# Altium PCB Sensor.PcbDoc (part 1 of 3)
Units mil, origin at the board's own origin, x right, y up, seen from the top; angles counter-clockwise.
Board outline 4000 x 3000 mil, 2 copper layers (Top Layer, Bottom Layer); 1202 components, 71 nets, 2560 pads, 0 vias.
Unrouted connection lines stored in the file: 2489.
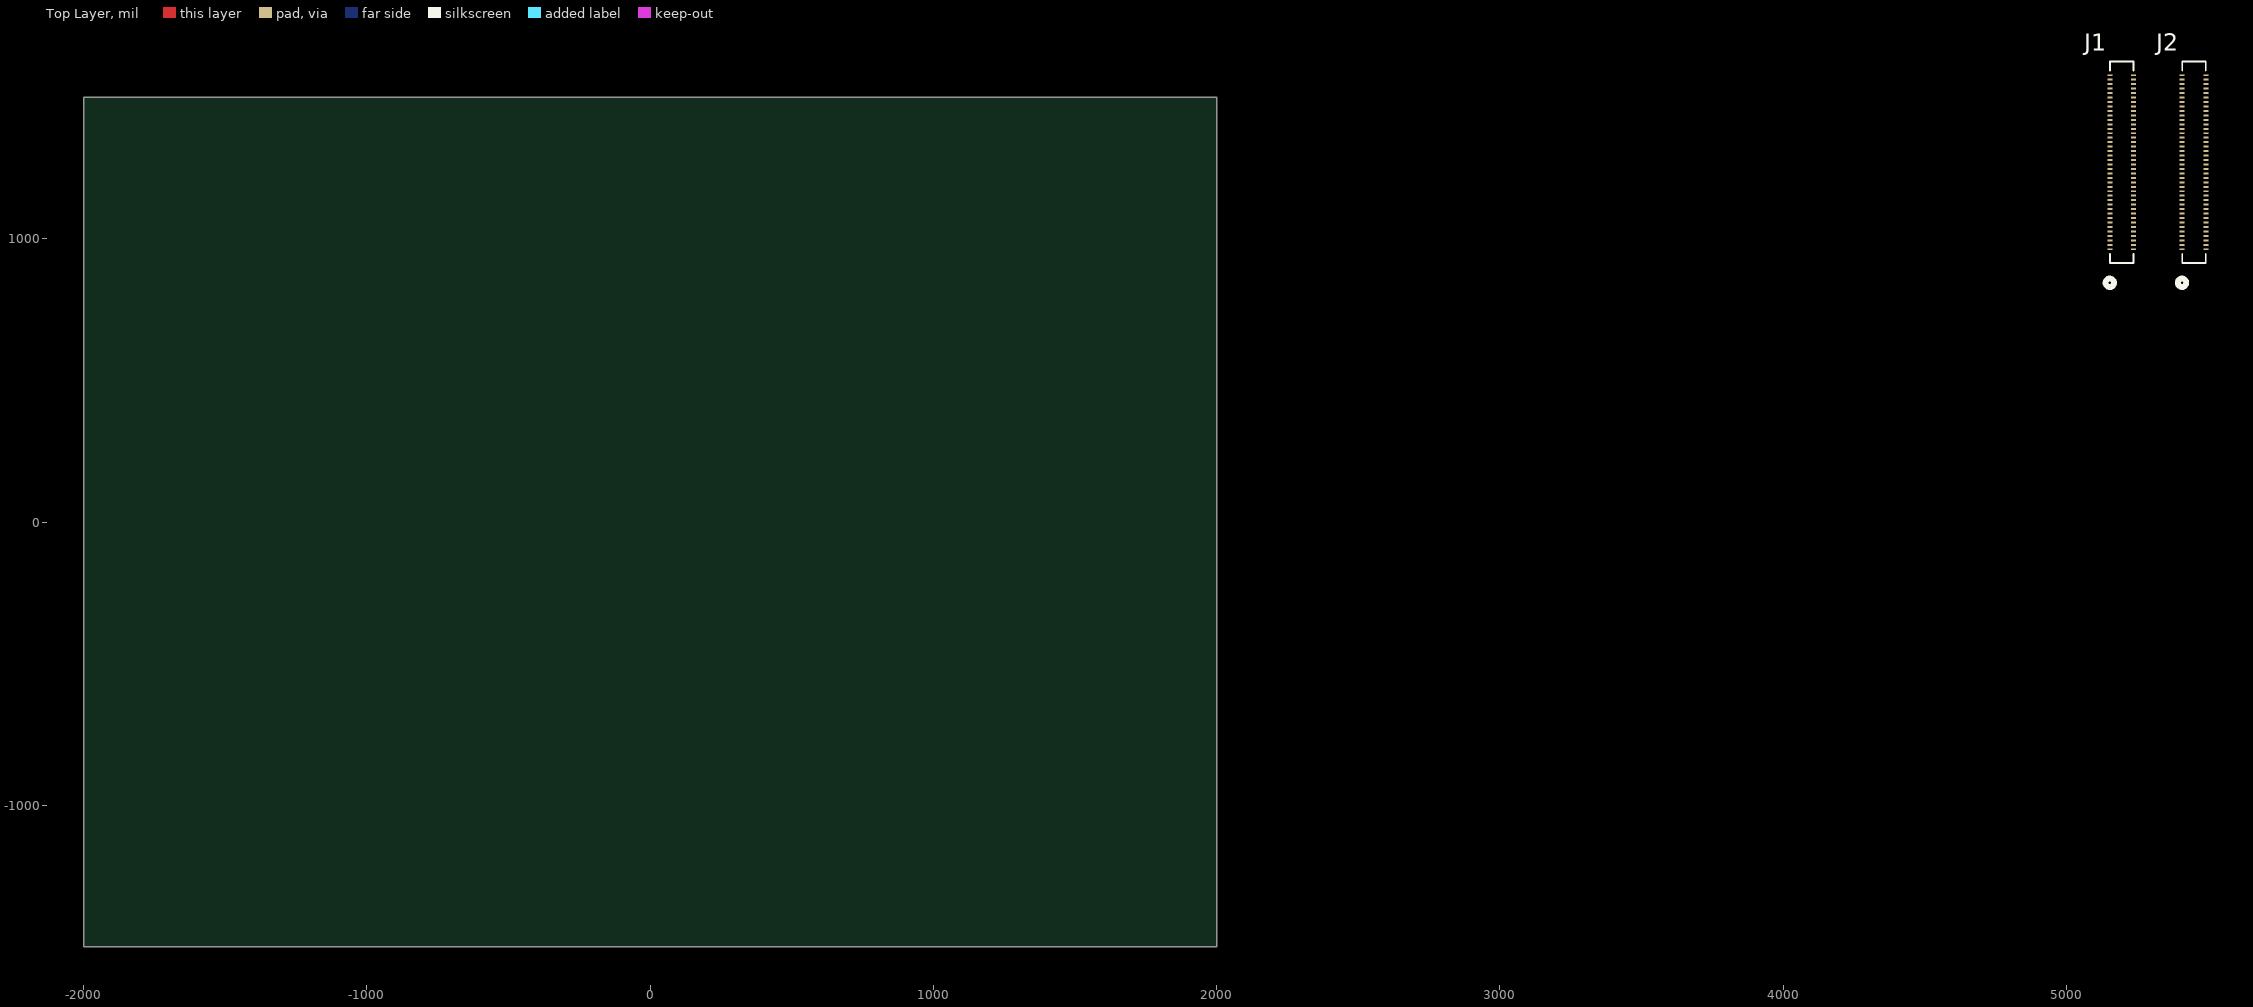
[diagram p0: Top Layer view]
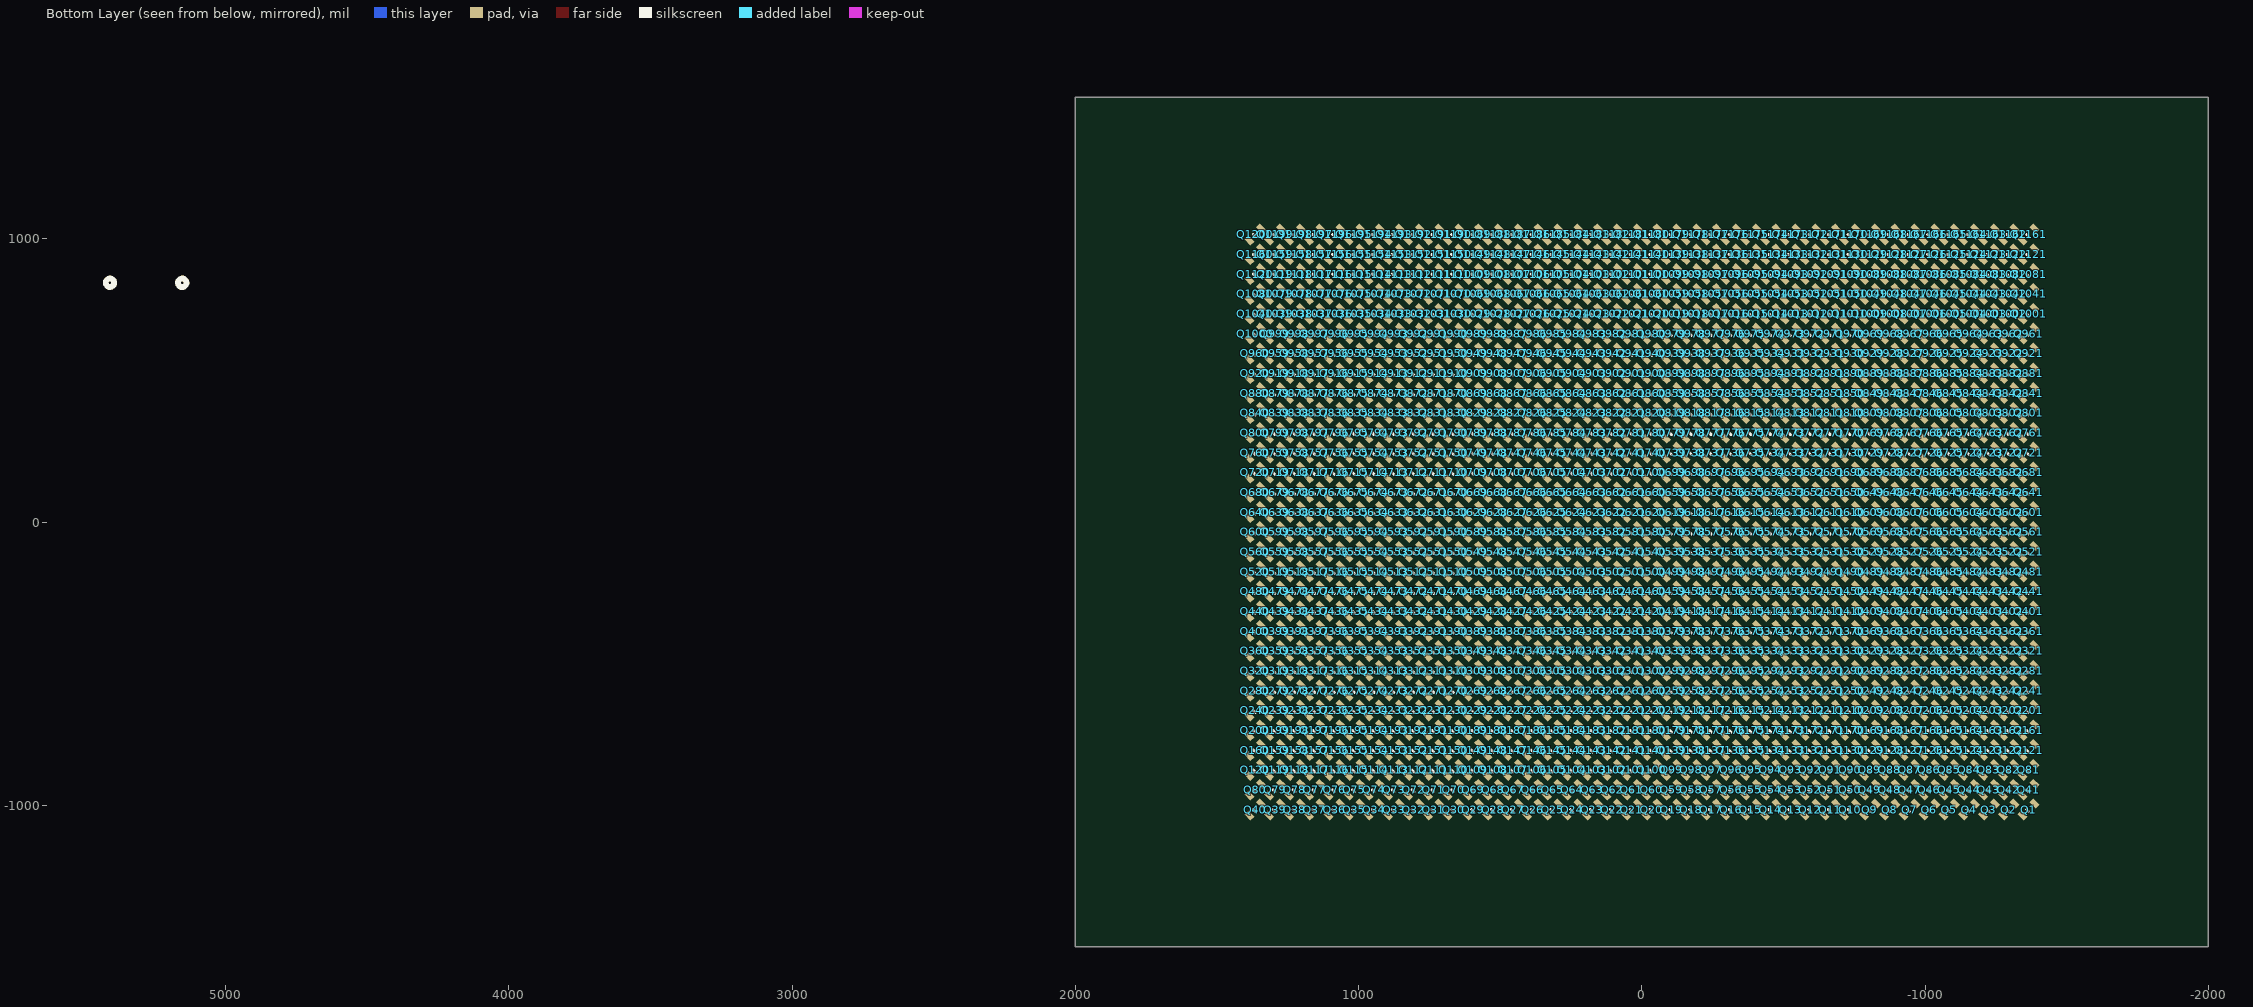
[diagram p1: Bottom Layer view, seen from below]

## Layer stack, top to bottom
Top Solder: solder mask 0.4, Solder Resist, Dk 3.5
Top Layer: signal copper 1.4
Dielectric 1: dielectric 12.6, FR-4, Dk 4.8
Bottom Layer: signal copper 1.4
Bottom Solder: solder mask 0.4, Solder Resist, Dk 3.5

## Board outline
-2000,-1500 -2000,1500 2000,1500 2000,-1500 -105,-1500

## Design rules (kind name [scope] priority, off if disabled: settings)
Clearance [All] p1: gap=10 ignorepadtopadclearanceinfootprint=FALSE except(0: Arc-Hole Track-Hole SMDPad-Hole THPad-Hole Via-Hole Fill-Hole Poly-Hole Region-Hole Text-Hole)
PolygonConnect [All] p1: connectstyle=Relief reliefconductorwidth=10 reliefentries=4 polygonreliefangle="90 Angle" airgapwidth=10
RoutingVias [All] p1: holewidth=28 width=50 viastyle="Through Hole" minholewidth=28 minwidth=50 maxholewidth=28 maxwidth=50
SolderMaskExpansion [All] p1: expansion=4 istentingtop=FALSE
Width [All] p1: maxlimit=10 minlimit=10 preferedwidth=10
30 further rules are at their usual default settings.

## Classes and differential pairs
component class Sensor: J1 J2

## Components (designator, comment, footprint, x,y, rotation, side; value= is the part's Value field where it differs from the comment)
J1 "80 Pin Connector" AXT680124A 5195,1270 r90 top
J2 "80 Pin Connector" AXT680124A 5450,1270 r90 top
Q1 "B19H1LS--H9C000114U1930" B19H1LS--H9C000114U1930 -1365,-1015 r135 bottom
Q2 "B19H1LS--H9C000114U1930" B19H1LS--H9C000114U1930 -1295,-1015 r135 bottom
Q3 "B19H1LS--H9C000114U1930" B19H1LS--H9C000114U1930 -1225,-1015 r135 bottom
Q4 "B19H1LS--H9C000114U1930" B19H1LS--H9C000114U1930 -1155,-1015 r135 bottom
Q5 "B19H1LS--H9C000114U1930" B19H1LS--H9C000114U1930 -1085,-1015 r135 bottom
Q6 "B19H1LS--H9C000114U1930" B19H1LS--H9C000114U1930 -1015,-1015 r135 bottom
Q7 "B19H1LS--H9C000114U1930" B19H1LS--H9C000114U1930 -945,-1015 r135 bottom
Q8 "B19H1LS--H9C000114U1930" B19H1LS--H9C000114U1930 -875,-1015 r135 bottom
Q9 "B19H1LS--H9C000114U1930" B19H1LS--H9C000114U1930 -805,-1015 r135 bottom
Q10 "B19H1LS--H9C000114U1930" B19H1LS--H9C000114U1930 -735,-1015 r135 bottom
Q11 "B19H1LS--H9C000114U1930" B19H1LS--H9C000114U1930 -665,-1015 r135 bottom
Q12 "B19H1LS--H9C000114U1930" B19H1LS--H9C000114U1930 -595,-1015 r135 bottom
Q13 "B19H1LS--H9C000114U1930" B19H1LS--H9C000114U1930 -525,-1015 r135 bottom
Q14 "B19H1LS--H9C000114U1930" B19H1LS--H9C000114U1930 -455,-1015 r135 bottom
Q15 "B19H1LS--H9C000114U1930" B19H1LS--H9C000114U1930 -385,-1015 r135 bottom
Q16 "B19H1LS--H9C000114U1930" B19H1LS--H9C000114U1930 -315,-1015 r135 bottom
Q17 "B19H1LS--H9C000114U1930" B19H1LS--H9C000114U1930 -245,-1015 r135 bottom
Q18 "B19H1LS--H9C000114U1930" B19H1LS--H9C000114U1930 -175,-1015 r135 bottom
Q19 "B19H1LS--H9C000114U1930" B19H1LS--H9C000114U1930 -105,-1015 r135 bottom
Q20 "B19H1LS--H9C000114U1930" B19H1LS--H9C000114U1930 -35,-1015 r135 bottom
Q21 "B19H1LS--H9C000114U1930" B19H1LS--H9C000114U1930 35,-1015 r135 bottom
Q22 "B19H1LS--H9C000114U1930" B19H1LS--H9C000114U1930 105,-1015 r135 bottom
Q23 "B19H1LS--H9C000114U1930" B19H1LS--H9C000114U1930 175,-1015 r135 bottom
Q24 "B19H1LS--H9C000114U1930" B19H1LS--H9C000114U1930 245,-1015 r135 bottom
Q25 "B19H1LS--H9C000114U1930" B19H1LS--H9C000114U1930 315,-1015 r135 bottom
Q26 "B19H1LS--H9C000114U1930" B19H1LS--H9C000114U1930 385,-1015 r135 bottom
Q27 "B19H1LS--H9C000114U1930" B19H1LS--H9C000114U1930 455,-1015 r135 bottom
Q28 "B19H1LS--H9C000114U1930" B19H1LS--H9C000114U1930 525,-1015 r135 bottom
Q29 "B19H1LS--H9C000114U1930" B19H1LS--H9C000114U1930 595,-1015 r135 bottom
Q30 "B19H1LS--H9C000114U1930" B19H1LS--H9C000114U1930 665,-1015 r135 bottom
Q31 "B19H1LS--H9C000114U1930" B19H1LS--H9C000114U1930 735,-1015 r135 bottom
Q32 "B19H1LS--H9C000114U1930" B19H1LS--H9C000114U1930 805,-1015 r135 bottom
Q33 "B19H1LS--H9C000114U1930" B19H1LS--H9C000114U1930 875,-1015 r135 bottom
Q34 "B19H1LS--H9C000114U1930" B19H1LS--H9C000114U1930 945,-1015 r135 bottom
Q35 "B19H1LS--H9C000114U1930" B19H1LS--H9C000114U1930 1015,-1015 r135 bottom
Q36 "B19H1LS--H9C000114U1930" B19H1LS--H9C000114U1930 1085,-1015 r135 bottom
Q37 "B19H1LS--H9C000114U1930" B19H1LS--H9C000114U1930 1155,-1015 r135 bottom
Q38 "B19H1LS--H9C000114U1930" B19H1LS--H9C000114U1930 1225,-1015 r135 bottom
Q39 "B19H1LS--H9C000114U1930" B19H1LS--H9C000114U1930 1295,-1015 r135 bottom
Q40 "B19H1LS--H9C000114U1930" B19H1LS--H9C000114U1930 1365,-1015 r135 bottom
Q41 "B19H1LS--H9C000114U1930" B19H1LS--H9C000114U1930 -1365,-945 r135 bottom
Q42 "B19H1LS--H9C000114U1930" B19H1LS--H9C000114U1930 -1295,-945 r135 bottom
Q43 "B19H1LS--H9C000114U1930" B19H1LS--H9C000114U1930 -1225,-945 r135 bottom
Q44 "B19H1LS--H9C000114U1930" B19H1LS--H9C000114U1930 -1155,-945 r135 bottom
Q45 "B19H1LS--H9C000114U1930" B19H1LS--H9C000114U1930 -1085,-945 r135 bottom
Q46 "B19H1LS--H9C000114U1930" B19H1LS--H9C000114U1930 -1015,-945 r135 bottom
Q47 "B19H1LS--H9C000114U1930" B19H1LS--H9C000114U1930 -945,-945 r135 bottom
Q48 "B19H1LS--H9C000114U1930" B19H1LS--H9C000114U1930 -875,-945 r135 bottom
Q49 "B19H1LS--H9C000114U1930" B19H1LS--H9C000114U1930 -805,-945 r135 bottom
Q50 "B19H1LS--H9C000114U1930" B19H1LS--H9C000114U1930 -735,-945 r135 bottom
Q51 "B19H1LS--H9C000114U1930" B19H1LS--H9C000114U1930 -665,-945 r135 bottom
Q52 "B19H1LS--H9C000114U1930" B19H1LS--H9C000114U1930 -595,-945 r135 bottom
Q53 "B19H1LS--H9C000114U1930" B19H1LS--H9C000114U1930 -525,-945 r135 bottom
Q54 "B19H1LS--H9C000114U1930" B19H1LS--H9C000114U1930 -455,-945 r135 bottom
Q55 "B19H1LS--H9C000114U1930" B19H1LS--H9C000114U1930 -385,-945 r135 bottom
Q56 "B19H1LS--H9C000114U1930" B19H1LS--H9C000114U1930 -315,-945 r135 bottom
Q57 "B19H1LS--H9C000114U1930" B19H1LS--H9C000114U1930 -245,-945 r135 bottom
Q58 "B19H1LS--H9C000114U1930" B19H1LS--H9C000114U1930 -175,-945 r135 bottom
Q59 "B19H1LS--H9C000114U1930" B19H1LS--H9C000114U1930 -105,-945 r135 bottom
Q60 "B19H1LS--H9C000114U1930" B19H1LS--H9C000114U1930 -35,-945 r135 bottom
Q61 "B19H1LS--H9C000114U1930" B19H1LS--H9C000114U1930 35,-945 r135 bottom
Q62 "B19H1LS--H9C000114U1930" B19H1LS--H9C000114U1930 105,-945 r135 bottom
Q63 "B19H1LS--H9C000114U1930" B19H1LS--H9C000114U1930 175,-945 r135 bottom
Q64 "B19H1LS--H9C000114U1930" B19H1LS--H9C000114U1930 245,-945 r135 bottom
Q65 "B19H1LS--H9C000114U1930" B19H1LS--H9C000114U1930 315,-945 r135 bottom
Q66 "B19H1LS--H9C000114U1930" B19H1LS--H9C000114U1930 385,-945 r135 bottom
Q67 "B19H1LS--H9C000114U1930" B19H1LS--H9C000114U1930 455,-945 r135 bottom
Q68 "B19H1LS--H9C000114U1930" B19H1LS--H9C000114U1930 525,-945 r135 bottom
Q69 "B19H1LS--H9C000114U1930" B19H1LS--H9C000114U1930 595,-945 r135 bottom
Q70 "B19H1LS--H9C000114U1930" B19H1LS--H9C000114U1930 665,-945 r135 bottom
Q71 "B19H1LS--H9C000114U1930" B19H1LS--H9C000114U1930 735,-945 r135 bottom
Q72 "B19H1LS--H9C000114U1930" B19H1LS--H9C000114U1930 805,-945 r135 bottom
Q73 "B19H1LS--H9C000114U1930" B19H1LS--H9C000114U1930 875,-945 r135 bottom
Q74 "B19H1LS--H9C000114U1930" B19H1LS--H9C000114U1930 945,-945 r135 bottom
Q75 "B19H1LS--H9C000114U1930" B19H1LS--H9C000114U1930 1015,-945 r135 bottom
Q76 "B19H1LS--H9C000114U1930" B19H1LS--H9C000114U1930 1085,-945 r135 bottom
Q77 "B19H1LS--H9C000114U1930" B19H1LS--H9C000114U1930 1155,-945 r135 bottom
Q78 "B19H1LS--H9C000114U1930" B19H1LS--H9C000114U1930 1225,-945 r135 bottom
Q79 "B19H1LS--H9C000114U1930" B19H1LS--H9C000114U1930 1295,-945 r135 bottom
Q80 "B19H1LS--H9C000114U1930" B19H1LS--H9C000114U1930 1365,-945 r135 bottom
Q81 "B19H1LS--H9C000114U1930" B19H1LS--H9C000114U1930 -1365,-875 r135 bottom
Q82 "B19H1LS--H9C000114U1930" B19H1LS--H9C000114U1930 -1295,-875 r135 bottom
Q83 "B19H1LS--H9C000114U1930" B19H1LS--H9C000114U1930 -1225,-875 r135 bottom
Q84 "B19H1LS--H9C000114U1930" B19H1LS--H9C000114U1930 -1155,-875 r135 bottom
Q85 "B19H1LS--H9C000114U1930" B19H1LS--H9C000114U1930 -1085,-875 r135 bottom
Q86 "B19H1LS--H9C000114U1930" B19H1LS--H9C000114U1930 -1015,-875 r135 bottom
Q87 "B19H1LS--H9C000114U1930" B19H1LS--H9C000114U1930 -945,-875 r135 bottom
Q88 "B19H1LS--H9C000114U1930" B19H1LS--H9C000114U1930 -875,-875 r135 bottom
Q89 "B19H1LS--H9C000114U1930" B19H1LS--H9C000114U1930 -805,-875 r135 bottom
Q90 "B19H1LS--H9C000114U1930" B19H1LS--H9C000114U1930 -735,-875 r135 bottom
Q91 "B19H1LS--H9C000114U1930" B19H1LS--H9C000114U1930 -665,-875 r135 bottom
Q92 "B19H1LS--H9C000114U1930" B19H1LS--H9C000114U1930 -595,-875 r135 bottom
Q93 "B19H1LS--H9C000114U1930" B19H1LS--H9C000114U1930 -525,-875 r135 bottom
Q94 "B19H1LS--H9C000114U1930" B19H1LS--H9C000114U1930 -455,-875 r135 bottom
Q95 "B19H1LS--H9C000114U1930" B19H1LS--H9C000114U1930 -385,-875 r135 bottom
Q96 "B19H1LS--H9C000114U1930" B19H1LS--H9C000114U1930 -315,-875 r135 bottom
Q97 "B19H1LS--H9C000114U1930" B19H1LS--H9C000114U1930 -245,-875 r135 bottom
Q98 "B19H1LS--H9C000114U1930" B19H1LS--H9C000114U1930 -175,-875 r135 bottom
Q99 "B19H1LS--H9C000114U1930" B19H1LS--H9C000114U1930 -105,-875 r135 bottom
Q100 "B19H1LS--H9C000114U1930" B19H1LS--H9C000114U1930 -35,-875 r135 bottom
Q101 "B19H1LS--H9C000114U1930" B19H1LS--H9C000114U1930 35,-875 r135 bottom
Q102 "B19H1LS--H9C000114U1930" B19H1LS--H9C000114U1930 105,-875 r135 bottom
Q103 "B19H1LS--H9C000114U1930" B19H1LS--H9C000114U1930 175,-875 r135 bottom
Q104 "B19H1LS--H9C000114U1930" B19H1LS--H9C000114U1930 245,-875 r135 bottom
Q105 "B19H1LS--H9C000114U1930" B19H1LS--H9C000114U1930 315,-875 r135 bottom
Q106 "B19H1LS--H9C000114U1930" B19H1LS--H9C000114U1930 385,-875 r135 bottom
Q107 "B19H1LS--H9C000114U1930" B19H1LS--H9C000114U1930 455,-875 r135 bottom
Q108 "B19H1LS--H9C000114U1930" B19H1LS--H9C000114U1930 525,-875 r135 bottom
Q109 "B19H1LS--H9C000114U1930" B19H1LS--H9C000114U1930 595,-875 r135 bottom
Q110 "B19H1LS--H9C000114U1930" B19H1LS--H9C000114U1930 665,-875 r135 bottom
Q111 "B19H1LS--H9C000114U1930" B19H1LS--H9C000114U1930 735,-875 r135 bottom
Q112 "B19H1LS--H9C000114U1930" B19H1LS--H9C000114U1930 805,-875 r135 bottom
Q113 "B19H1LS--H9C000114U1930" B19H1LS--H9C000114U1930 875,-875 r135 bottom
Q114 "B19H1LS--H9C000114U1930" B19H1LS--H9C000114U1930 945,-875 r135 bottom
Q115 "B19H1LS--H9C000114U1930" B19H1LS--H9C000114U1930 1015,-875 r135 bottom
Q116 "B19H1LS--H9C000114U1930" B19H1LS--H9C000114U1930 1085,-875 r135 bottom
Q117 "B19H1LS--H9C000114U1930" B19H1LS--H9C000114U1930 1155,-875 r135 bottom
Q118 "B19H1LS--H9C000114U1930" B19H1LS--H9C000114U1930 1225,-875 r135 bottom
Q119 "B19H1LS--H9C000114U1930" B19H1LS--H9C000114U1930 1295,-875 r135 bottom
Q120 "B19H1LS--H9C000114U1930" B19H1LS--H9C000114U1930 1365,-875 r135 bottom
Q121 "B19H1LS--H9C000114U1930" B19H1LS--H9C000114U1930 -1365,-805 r135 bottom
Q122 "B19H1LS--H9C000114U1930" B19H1LS--H9C000114U1930 -1295,-805 r135 bottom
Q123 "B19H1LS--H9C000114U1930" B19H1LS--H9C000114U1930 -1225,-805 r135 bottom
Q124 "B19H1LS--H9C000114U1930" B19H1LS--H9C000114U1930 -1155,-805 r135 bottom
Q125 "B19H1LS--H9C000114U1930" B19H1LS--H9C000114U1930 -1085,-805 r135 bottom
Q126 "B19H1LS--H9C000114U1930" B19H1LS--H9C000114U1930 -1015,-805 r135 bottom
Q127 "B19H1LS--H9C000114U1930" B19H1LS--H9C000114U1930 -945,-805 r135 bottom
Q128 "B19H1LS--H9C000114U1930" B19H1LS--H9C000114U1930 -875,-805 r135 bottom
Q129 "B19H1LS--H9C000114U1930" B19H1LS--H9C000114U1930 -805,-805 r135 bottom
Q130 "B19H1LS--H9C000114U1930" B19H1LS--H9C000114U1930 -735,-805 r135 bottom
Q131 "B19H1LS--H9C000114U1930" B19H1LS--H9C000114U1930 -665,-805 r135 bottom
Q132 "B19H1LS--H9C000114U1930" B19H1LS--H9C000114U1930 -595,-805 r135 bottom
Q133 "B19H1LS--H9C000114U1930" B19H1LS--H9C000114U1930 -525,-805 r135 bottom
Q134 "B19H1LS--H9C000114U1930" B19H1LS--H9C000114U1930 -455,-805 r135 bottom
Q135 "B19H1LS--H9C000114U1930" B19H1LS--H9C000114U1930 -385,-805 r135 bottom
Q136 "B19H1LS--H9C000114U1930" B19H1LS--H9C000114U1930 -315,-805 r135 bottom
Q137 "B19H1LS--H9C000114U1930" B19H1LS--H9C000114U1930 -245,-805 r135 bottom
Q138 "B19H1LS--H9C000114U1930" B19H1LS--H9C000114U1930 -175,-805 r135 bottom
Q139 "B19H1LS--H9C000114U1930" B19H1LS--H9C000114U1930 -105,-805 r135 bottom
Q140 "B19H1LS--H9C000114U1930" B19H1LS--H9C000114U1930 -35,-805 r135 bottom
Q141 "B19H1LS--H9C000114U1930" B19H1LS--H9C000114U1930 35,-805 r135 bottom
Q142 "B19H1LS--H9C000114U1930" B19H1LS--H9C000114U1930 105,-805 r135 bottom
Q143 "B19H1LS--H9C000114U1930" B19H1LS--H9C000114U1930 175,-805 r135 bottom
Q144 "B19H1LS--H9C000114U1930" B19H1LS--H9C000114U1930 245,-805 r135 bottom
Q145 "B19H1LS--H9C000114U1930" B19H1LS--H9C000114U1930 315,-805 r135 bottom
Q146 "B19H1LS--H9C000114U1930" B19H1LS--H9C000114U1930 385,-805 r135 bottom
Q147 "B19H1LS--H9C000114U1930" B19H1LS--H9C000114U1930 455,-805 r135 bottom
Q148 "B19H1LS--H9C000114U1930" B19H1LS--H9C000114U1930 525,-805 r135 bottom
Q149 "B19H1LS--H9C000114U1930" B19H1LS--H9C000114U1930 595,-805 r135 bottom
Q150 "B19H1LS--H9C000114U1930" B19H1LS--H9C000114U1930 665,-805 r135 bottom
Q151 "B19H1LS--H9C000114U1930" B19H1LS--H9C000114U1930 735,-805 r135 bottom
Q152 "B19H1LS--H9C000114U1930" B19H1LS--H9C000114U1930 805,-805 r135 bottom
Q153 "B19H1LS--H9C000114U1930" B19H1LS--H9C000114U1930 875,-805 r135 bottom
Q154 "B19H1LS--H9C000114U1930" B19H1LS--H9C000114U1930 945,-805 r135 bottom
Q155 "B19H1LS--H9C000114U1930" B19H1LS--H9C000114U1930 1015,-805 r135 bottom
Q156 "B19H1LS--H9C000114U1930" B19H1LS--H9C000114U1930 1085,-805 r135 bottom
Q157 "B19H1LS--H9C000114U1930" B19H1LS--H9C000114U1930 1155,-805 r135 bottom
Q158 "B19H1LS--H9C000114U1930" B19H1LS--H9C000114U1930 1225,-805 r135 bottom
Q159 "B19H1LS--H9C000114U1930" B19H1LS--H9C000114U1930 1295,-805 r135 bottom
Q160 "B19H1LS--H9C000114U1930" B19H1LS--H9C000114U1930 1365,-805 r135 bottom
Q161 "B19H1LS--H9C000114U1930" B19H1LS--H9C000114U1930 -1365,-735 r135 bottom
Q162 "B19H1LS--H9C000114U1930" B19H1LS--H9C000114U1930 -1295,-735 r135 bottom
Q163 "B19H1LS--H9C000114U1930" B19H1LS--H9C000114U1930 -1225,-735 r135 bottom
Q164 "B19H1LS--H9C000114U1930" B19H1LS--H9C000114U1930 -1155,-735 r135 bottom
Q165 "B19H1LS--H9C000114U1930" B19H1LS--H9C000114U1930 -1085,-735 r135 bottom
Q166 "B19H1LS--H9C000114U1930" B19H1LS--H9C000114U1930 -1015,-735 r135 bottom
Q167 "B19H1LS--H9C000114U1930" B19H1LS--H9C000114U1930 -945,-735 r135 bottom
Q168 "B19H1LS--H9C000114U1930" B19H1LS--H9C000114U1930 -875,-735 r135 bottom
Q169 "B19H1LS--H9C000114U1930" B19H1LS--H9C000114U1930 -805,-735 r135 bottom
Q170 "B19H1LS--H9C000114U1930" B19H1LS--H9C000114U1930 -735,-735 r135 bottom
Q171 "B19H1LS--H9C000114U1930" B19H1LS--H9C000114U1930 -665,-735 r135 bottom
Q172 "B19H1LS--H9C000114U1930" B19H1LS--H9C000114U1930 -595,-735 r135 bottom
Q173 "B19H1LS--H9C000114U1930" B19H1LS--H9C000114U1930 -525,-735 r135 bottom
Q174 "B19H1LS--H9C000114U1930" B19H1LS--H9C000114U1930 -455,-735 r135 bottom
Q175 "B19H1LS--H9C000114U1930" B19H1LS--H9C000114U1930 -385,-735 r135 bottom
Q176 "B19H1LS--H9C000114U1930" B19H1LS--H9C000114U1930 -315,-735 r135 bottom
Q177 "B19H1LS--H9C000114U1930" B19H1LS--H9C000114U1930 -245,-735 r135 bottom
Q178 "B19H1LS--H9C000114U1930" B19H1LS--H9C000114U1930 -175,-735 r135 bottom
Q179 "B19H1LS--H9C000114U1930" B19H1LS--H9C000114U1930 -105,-735 r135 bottom
Q180 "B19H1LS--H9C000114U1930" B19H1LS--H9C000114U1930 -35,-735 r135 bottom
Q181 "B19H1LS--H9C000114U1930" B19H1LS--H9C000114U1930 35,-735 r135 bottom
Q182 "B19H1LS--H9C000114U1930" B19H1LS--H9C000114U1930 105,-735 r135 bottom
Q183 "B19H1LS--H9C000114U1930" B19H1LS--H9C000114U1930 175,-735 r135 bottom
Q184 "B19H1LS--H9C000114U1930" B19H1LS--H9C000114U1930 245,-735 r135 bottom
Q185 "B19H1LS--H9C000114U1930" B19H1LS--H9C000114U1930 315,-735 r135 bottom
Q186 "B19H1LS--H9C000114U1930" B19H1LS--H9C000114U1930 385,-735 r135 bottom
Q187 "B19H1LS--H9C000114U1930" B19H1LS--H9C000114U1930 455,-735 r135 bottom
Q188 "B19H1LS--H9C000114U1930" B19H1LS--H9C000114U1930 525,-735 r135 bottom
Q189 "B19H1LS--H9C000114U1930" B19H1LS--H9C000114U1930 595,-735 r135 bottom
Q190 "B19H1LS--H9C000114U1930" B19H1LS--H9C000114U1930 665,-735 r135 bottom
Q191 "B19H1LS--H9C000114U1930" B19H1LS--H9C000114U1930 735,-735 r135 bottom
Q192 "B19H1LS--H9C000114U1930" B19H1LS--H9C000114U1930 805,-735 r135 bottom
Q193 "B19H1LS--H9C000114U1930" B19H1LS--H9C000114U1930 875,-735 r135 bottom
Q194 "B19H1LS--H9C000114U1930" B19H1LS--H9C000114U1930 945,-735 r135 bottom
Q195 "B19H1LS--H9C000114U1930" B19H1LS--H9C000114U1930 1015,-735 r135 bottom
Q196 "B19H1LS--H9C000114U1930" B19H1LS--H9C000114U1930 1085,-735 r135 bottom
Q197 "B19H1LS--H9C000114U1930" B19H1LS--H9C000114U1930 1155,-735 r135 bottom
Q198 "B19H1LS--H9C000114U1930" B19H1LS--H9C000114U1930 1225,-735 r135 bottom
Q199 "B19H1LS--H9C000114U1930" B19H1LS--H9C000114U1930 1295,-735 r135 bottom
Q200 "B19H1LS--H9C000114U1930" B19H1LS--H9C000114U1930 1365,-735 r135 bottom
Q201 "B19H1LS--H9C000114U1930" B19H1LS--H9C000114U1930 -1365,-665 r135 bottom
Q202 "B19H1LS--H9C000114U1930" B19H1LS--H9C000114U1930 -1295,-665 r135 bottom
Q203 "B19H1LS--H9C000114U1930" B19H1LS--H9C000114U1930 -1225,-665 r135 bottom
Q204 "B19H1LS--H9C000114U1930" B19H1LS--H9C000114U1930 -1155,-665 r135 bottom
Q205 "B19H1LS--H9C000114U1930" B19H1LS--H9C000114U1930 -1085,-665 r135 bottom
Q206 "B19H1LS--H9C000114U1930" B19H1LS--H9C000114U1930 -1015,-665 r135 bottom
Q207 "B19H1LS--H9C000114U1930" B19H1LS--H9C000114U1930 -945,-665 r135 bottom
Q208 "B19H1LS--H9C000114U1930" B19H1LS--H9C000114U1930 -875,-665 r135 bottom
Q209 "B19H1LS--H9C000114U1930" B19H1LS--H9C000114U1930 -805,-665 r135 bottom
Q210 "B19H1LS--H9C000114U1930" B19H1LS--H9C000114U1930 -735,-665 r135 bottom
Q211 "B19H1LS--H9C000114U1930" B19H1LS--H9C000114U1930 -665,-665 r135 bottom
Q212 "B19H1LS--H9C000114U1930" B19H1LS--H9C000114U1930 -595,-665 r135 bottom
Q213 "B19H1LS--H9C000114U1930" B19H1LS--H9C000114U1930 -525,-665 r135 bottom
Q214 "B19H1LS--H9C000114U1930" B19H1LS--H9C000114U1930 -455,-665 r135 bottom
Q215 "B19H1LS--H9C000114U1930" B19H1LS--H9C000114U1930 -385,-665 r135 bottom
Q216 "B19H1LS--H9C000114U1930" B19H1LS--H9C000114U1930 -315,-665 r135 bottom
Q217 "B19H1LS--H9C000114U1930" B19H1LS--H9C000114U1930 -245,-665 r135 bottom
Q218 "B19H1LS--H9C000114U1930" B19H1LS--H9C000114U1930 -175,-665 r135 bottom
Q219 "B19H1LS--H9C000114U1930" B19H1LS--H9C000114U1930 -105,-665 r135 bottom
Q220 "B19H1LS--H9C000114U1930" B19H1LS--H9C000114U1930 -35,-665 r135 bottom
Q221 "B19H1LS--H9C000114U1930" B19H1LS--H9C000114U1930 35,-665 r135 bottom
Q222 "B19H1LS--H9C000114U1930" B19H1LS--H9C000114U1930 105,-665 r135 bottom
Q223 "B19H1LS--H9C000114U1930" B19H1LS--H9C000114U1930 175,-665 r135 bottom
Q224 "B19H1LS--H9C000114U1930" B19H1LS--H9C000114U1930 245,-665 r135 bottom
Q225 "B19H1LS--H9C000114U1930" B19H1LS--H9C000114U1930 315,-665 r135 bottom
Q226 "B19H1LS--H9C000114U1930" B19H1LS--H9C000114U1930 385,-665 r135 bottom
Q227 "B19H1LS--H9C000114U1930" B19H1LS--H9C000114U1930 455,-665 r135 bottom
Q228 "B19H1LS--H9C000114U1930" B19H1LS--H9C000114U1930 525,-665 r135 bottom
Q229 "B19H1LS--H9C000114U1930" B19H1LS--H9C000114U1930 595,-665 r135 bottom
Q230 "B19H1LS--H9C000114U1930" B19H1LS--H9C000114U1930 665,-665 r135 bottom
Q231 "B19H1LS--H9C000114U1930" B19H1LS--H9C000114U1930 735,-665 r135 bottom
Q232 "B19H1LS--H9C000114U1930" B19H1LS--H9C000114U1930 805,-665 r135 bottom
Q233 "B19H1LS--H9C000114U1930" B19H1LS--H9C000114U1930 875,-665 r135 bottom
Q234 "B19H1LS--H9C000114U1930" B19H1LS--H9C000114U1930 945,-665 r135 bottom
Q235 "B19H1LS--H9C000114U1930" B19H1LS--H9C000114U1930 1015,-665 r135 bottom
Q236 "B19H1LS--H9C000114U1930" B19H1LS--H9C000114U1930 1085,-665 r135 bottom
Q237 "B19H1LS--H9C000114U1930" B19H1LS--H9C000114U1930 1155,-665 r135 bottom
Q238 "B19H1LS--H9C000114U1930" B19H1LS--H9C000114U1930 1225,-665 r135 bottom
Q239 "B19H1LS--H9C000114U1930" B19H1LS--H9C000114U1930 1295,-665 r135 bottom
Q240 "B19H1LS--H9C000114U1930" B19H1LS--H9C000114U1930 1365,-665 r135 bottom
Q241 "B19H1LS--H9C000114U1930" B19H1LS--H9C000114U1930 -1365,-595 r135 bottom
Q242 "B19H1LS--H9C000114U1930" B19H1LS--H9C000114U1930 -1295,-595 r135 bottom
Q243 "B19H1LS--H9C000114U1930" B19H1LS--H9C000114U1930 -1225,-595 r135 bottom
Q244 "B19H1LS--H9C000114U1930" B19H1LS--H9C000114U1930 -1155,-595 r135 bottom
Q245 "B19H1LS--H9C000114U1930" B19H1LS--H9C000114U1930 -1085,-595 r135 bottom
Q246 "B19H1LS--H9C000114U1930" B19H1LS--H9C000114U1930 -1015,-595 r135 bottom
Q247 "B19H1LS--H9C000114U1930" B19H1LS--H9C000114U1930 -945,-595 r135 bottom
Q248 "B19H1LS--H9C000114U1930" B19H1LS--H9C000114U1930 -875,-595 r135 bottom
Q249 "B19H1LS--H9C000114U1930" B19H1LS--H9C000114U1930 -805,-595 r135 bottom
Q250 "B19H1LS--H9C000114U1930" B19H1LS--H9C000114U1930 -735,-595 r135 bottom
Q251 "B19H1LS--H9C000114U1930" B19H1LS--H9C000114U1930 -665,-595 r135 bottom
Q252 "B19H1LS--H9C000114U1930" B19H1LS--H9C000114U1930 -595,-595 r135 bottom
Q253 "B19H1LS--H9C000114U1930" B19H1LS--H9C000114U1930 -525,-595 r135 bottom
Q254 "B19H1LS--H9C000114U1930" B19H1LS--H9C000114U1930 -455,-595 r135 bottom
Q255 "B19H1LS--H9C000114U1930" B19H1LS--H9C000114U1930 -385,-595 r135 bottom
Q256 "B19H1LS--H9C000114U1930" B19H1LS--H9C000114U1930 -315,-595 r135 bottom
Q257 "B19H1LS--H9C000114U1930" B19H1LS--H9C000114U1930 -245,-595 r135 bottom
Q258 "B19H1LS--H9C000114U1930" B19H1LS--H9C000114U1930 -175,-595 r135 bottom
Q259 "B19H1LS--H9C000114U1930" B19H1LS--H9C000114U1930 -105,-595 r135 bottom
Q260 "B19H1LS--H9C000114U1930" B19H1LS--H9C000114U1930 -35,-595 r135 bottom
Q261 "B19H1LS--H9C000114U1930" B19H1LS--H9C000114U1930 35,-595 r135 bottom
Q262 "B19H1LS--H9C000114U1930" B19H1LS--H9C000114U1930 105,-595 r135 bottom
Q263 "B19H1LS--H9C000114U1930" B19H1LS--H9C000114U1930 175,-595 r135 bottom
Q264 "B19H1LS--H9C000114U1930" B19H1LS--H9C000114U1930 245,-595 r135 bottom
Q265 "B19H1LS--H9C000114U1930" B19H1LS--H9C000114U1930 315,-595 r135 bottom
Q266 "B19H1LS--H9C000114U1930" B19H1LS--H9C000114U1930 385,-595 r135 bottom
Q267 "B19H1LS--H9C000114U1930" B19H1LS--H9C000114U1930 455,-595 r135 bottom
Q268 "B19H1LS--H9C000114U1930" B19H1LS--H9C000114U1930 525,-595 r135 bottom
Q269 "B19H1LS--H9C000114U1930" B19H1LS--H9C000114U1930 595,-595 r135 bottom
Q270 "B19H1LS--H9C000114U1930" B19H1LS--H9C000114U1930 665,-595 r135 bottom
Q271 "B19H1LS--H9C000114U1930" B19H1LS--H9C000114U1930 735,-595 r135 bottom
Q272 "B19H1LS--H9C000114U1930" B19H1LS--H9C000114U1930 805,-595 r135 bottom
Q273 "B19H1LS--H9C000114U1930" B19H1LS--H9C000114U1930 875,-595 r135 bottom
Q274 "B19H1LS--H9C000114U1930" B19H1LS--H9C000114U1930 945,-595 r135 bottom
Q275 "B19H1LS--H9C000114U1930" B19H1LS--H9C000114U1930 1015,-595 r135 bottom
Q276 "B19H1LS--H9C000114U1930" B19H1LS--H9C000114U1930 1085,-595 r135 bottom
Q277 "B19H1LS--H9C000114U1930" B19H1LS--H9C000114U1930 1155,-595 r135 bottom
Q278 "B19H1LS--H9C000114U1930" B19H1LS--H9C000114U1930 1225,-595 r135 bottom
Q279 "B19H1LS--H9C000114U1930" B19H1LS--H9C000114U1930 1295,-595 r135 bottom
Q280 "B19H1LS--H9C000114U1930" B19H1LS--H9C000114U1930 1365,-595 r135 bottom
Q281 "B19H1LS--H9C000114U1930" B19H1LS--H9C000114U1930 -1365,-525 r135 bottom
Q282 "B19H1LS--H9C000114U1930" B19H1LS--H9C000114U1930 -1295,-525 r135 bottom
Q283 "B19H1LS--H9C000114U1930" B19H1LS--H9C000114U1930 -1225,-525 r135 bottom
Q284 "B19H1LS--H9C000114U1930" B19H1LS--H9C000114U1930 -1155,-525 r135 bottom
Q285 "B19H1LS--H9C000114U1930" B19H1LS--H9C000114U1930 -1085,-525 r135 bottom
Q286 "B19H1LS--H9C000114U1930" B19H1LS--H9C000114U1930 -1015,-525 r135 bottom
Q287 "B19H1LS--H9C000114U1930" B19H1LS--H9C000114U1930 -945,-525 r135 bottom
Q288 "B19H1LS--H9C000114U1930" B19H1LS--H9C000114U1930 -875,-525 r135 bottom
Q289 "B19H1LS--H9C000114U1930" B19H1LS--H9C000114U1930 -805,-525 r135 bottom
Q290 "B19H1LS--H9C000114U1930" B19H1LS--H9C000114U1930 -735,-525 r135 bottom
Q291 "B19H1LS--H9C000114U1930" B19H1LS--H9C000114U1930 -665,-525 r135 bottom
Q292 "B19H1LS--H9C000114U1930" B19H1LS--H9C000114U1930 -595,-525 r135 bottom
Q293 "B19H1LS--H9C000114U1930" B19H1LS--H9C000114U1930 -525,-525 r135 bottom
Q294 "B19H1LS--H9C000114U1930" B19H1LS--H9C000114U1930 -455,-525 r135 bottom
Q295 "B19H1LS--H9C000114U1930" B19H1LS--H9C000114U1930 -385,-525 r135 bottom
Q296 "B19H1LS--H9C000114U1930" B19H1LS--H9C000114U1930 -315,-525 r135 bottom
Q297 "B19H1LS--H9C000114U1930" B19H1LS--H9C000114U1930 -245,-525 r135 bottom
Q298 "B19H1LS--H9C000114U1930" B19H1LS--H9C000114U1930 -175,-525 r135 bottom
Q299 "B19H1LS--H9C000114U1930" B19H1LS--H9C000114U1930 -105,-525 r135 bottom
Q300 "B19H1LS--H9C000114U1930" B19H1LS--H9C000114U1930 -35,-525 r135 bottom
Q301 "B19H1LS--H9C000114U1930" B19H1LS--H9C000114U1930 35,-525 r135 bottom
Q302 "B19H1LS--H9C000114U1930" B19H1LS--H9C000114U1930 105,-525 r135 bottom
Q303 "B19H1LS--H9C000114U1930" B19H1LS--H9C000114U1930 175,-525 r135 bottom
Q304 "B19H1LS--H9C000114U1930" B19H1LS--H9C000114U1930 245,-525 r135 bottom
Q305 "B19H1LS--H9C000114U1930" B19H1LS--H9C000114U1930 315,-525 r135 bottom
Q306 "B19H1LS--H9C000114U1930" B19H1LS--H9C000114U1930 385,-525 r135 bottom
Q307 "B19H1LS--H9C000114U1930" B19H1LS--H9C000114U1930 455,-525 r135 bottom
Q308 "B19H1LS--H9C000114U1930" B19H1LS--H9C000114U1930 525,-525 r135 bottom
Q309 "B19H1LS--H9C000114U1930" B19H1LS--H9C000114U1930 595,-525 r135 bottom
Q310 "B19H1LS--H9C000114U1930" B19H1LS--H9C000114U1930 665,-525 r135 bottom
Q311 "B19H1LS--H9C000114U1930" B19H1LS--H9C000114U1930 735,-525 r135 bottom
Q312 "B19H1LS--H9C000114U1930" B19H1LS--H9C000114U1930 805,-525 r135 bottom
Q313 "B19H1LS--H9C000114U1930" B19H1LS--H9C000114U1930 875,-525 r135 bottom
Q314 "B19H1LS--H9C000114U1930" B19H1LS--H9C000114U1930 945,-525 r135 bottom
Q315 "B19H1LS--H9C000114U1930" B19H1LS--H9C000114U1930 1015,-525 r135 bottom
Q316 "B19H1LS--H9C000114U1930" B19H1LS--H9C000114U1930 1085,-525 r135 bottom
Q317 "B19H1LS--H9C000114U1930" B19H1LS--H9C000114U1930 1155,-525 r135 bottom
Q318 "B19H1LS--H9C000114U1930" B19H1LS--H9C000114U1930 1225,-525 r135 bottom
Q319 "B19H1LS--H9C000114U1930" B19H1LS--H9C000114U1930 1295,-525 r135 bottom
Q320 "B19H1LS--H9C000114U1930" B19H1LS--H9C000114U1930 1365,-525 r135 bottom
Q321 "B19H1LS--H9C000114U1930" B19H1LS--H9C000114U1930 -1365,-455 r135 bottom
Q322 "B19H1LS--H9C000114U1930" B19H1LS--H9C000114U1930 -1295,-455 r135 bottom
Q323 "B19H1LS--H9C000114U1930" B19H1LS--H9C000114U1930 -1225,-455 r135 bottom
Q324 "B19H1LS--H9C000114U1930" B19H1LS--H9C000114U1930 -1155,-455 r135 bottom
Q325 "B19H1LS--H9C000114U1930" B19H1LS--H9C000114U1930 -1085,-455 r135 bottom
Q326 "B19H1LS--H9C000114U1930" B19H1LS--H9C000114U1930 -1015,-455 r135 bottom
Q327 "B19H1LS--H9C000114U1930" B19H1LS--H9C000114U1930 -945,-455 r135 bottom
Q328 "B19H1LS--H9C000114U1930" B19H1LS--H9C000114U1930 -875,-455 r135 bottom
Q329 "B19H1LS--H9C000114U1930" B19H1LS--H9C000114U1930 -805,-455 r135 bottom
Q330 "B19H1LS--H9C000114U1930" B19H1LS--H9C000114U1930 -735,-455 r135 bottom
Q331 "B19H1LS--H9C000114U1930" B19H1LS--H9C000114U1930 -665,-455 r135 bottom
Q332 "B19H1LS--H9C000114U1930" B19H1LS--H9C000114U1930 -595,-455 r135 bottom
Q333 "B19H1LS--H9C000114U1930" B19H1LS--H9C000114U1930 -525,-455 r135 bottom
Q334 "B19H1LS--H9C000114U1930" B19H1LS--H9C000114U1930 -455,-455 r135 bottom
Q335 "B19H1LS--H9C000114U1930" B19H1LS--H9C000114U1930 -385,-455 r135 bottom
Q336 "B19H1LS--H9C000114U1930" B19H1LS--H9C000114U1930 -315,-455 r135 bottom
Q337 "B19H1LS--H9C000114U1930" B19H1LS--H9C000114U1930 -245,-455 r135 bottom
Q338 "B19H1LS--H9C000114U1930" B19H1LS--H9C000114U1930 -175,-455 r135 bottom
Q339 "B19H1LS--H9C000114U1930" B19H1LS--H9C000114U1930 -105,-455 r135 bottom
Q340 "B19H1LS--H9C000114U1930" B19H1LS--H9C000114U1930 -35,-455 r135 bottom
Q341 "B19H1LS--H9C000114U1930" B19H1LS--H9C000114U1930 35,-455 r135 bottom
Q342 "B19H1LS--H9C000114U1930" B19H1LS--H9C000114U1930 105,-455 r135 bottom
Q343 "B19H1LS--H9C000114U1930" B19H1LS--H9C000114U1930 175,-455 r135 bottom
Q344 "B19H1LS--H9C000114U1930" B19H1LS--H9C000114U1930 245,-455 r135 bottom
Q345 "B19H1LS--H9C000114U1930" B19H1LS--H9C000114U1930 315,-455 r135 bottom
Q346 "B19H1LS--H9C000114U1930" B19H1LS--H9C000114U1930 385,-455 r135 bottom
Q347 "B19H1LS--H9C000114U1930" B19H1LS--H9C000114U1930 455,-455 r135 bottom
Q348 "B19H1LS--H9C000114U1930" B19H1LS--H9C000114U1930 525,-455 r135 bottom
Q349 "B19H1LS--H9C000114U1930" B19H1LS--H9C000114U1930 595,-455 r135 bottom
Q350 "B19H1LS--H9C000114U1930" B19H1LS--H9C000114U1930 665,-455 r135 bottom
Q351 "B19H1LS--H9C000114U1930" B19H1LS--H9C000114U1930 735,-455 r135 bottom
Q352 "B19H1LS--H9C000114U1930" B19H1LS--H9C000114U1930 805,-455 r135 bottom
Q353 "B19H1LS--H9C000114U1930" B19H1LS--H9C000114U1930 875,-455 r135 bottom
Q354 "B19H1LS--H9C000114U1930" B19H1LS--H9C000114U1930 945,-455 r135 bottom
Q355 "B19H1LS--H9C000114U1930" B19H1LS--H9C000114U1930 1015,-455 r135 bottom
Q356 "B19H1LS--H9C000114U1930" B19H1LS--H9C000114U1930 1085,-455 r135 bottom
Q357 "B19H1LS--H9C000114U1930" B19H1LS--H9C000114U1930 1155,-455 r135 bottom
Q358 "B19H1LS--H9C000114U1930" B19H1LS--H9C000114U1930 1225,-455 r135 bottom
Q359 "B19H1LS--H9C000114U1930" B19H1LS--H9C000114U1930 1295,-455 r135 bottom
Q360 "B19H1LS--H9C000114U1930" B19H1LS--H9C000114U1930 1365,-455 r135 bottom
Q361 "B19H1LS--H9C000114U1930" B19H1LS--H9C000114U1930 -1365,-385 r135 bottom
Q362 "B19H1LS--H9C000114U1930" B19H1LS--H9C000114U1930 -1295,-385 r135 bottom
Q363 "B19H1LS--H9C000114U1930" B19H1LS--H9C000114U1930 -1225,-385 r135 bottom
Q364 "B19H1LS--H9C000114U1930" B19H1LS--H9C000114U1930 -1155,-385 r135 bottom
Q365 "B19H1LS--H9C000114U1930" B19H1LS--H9C000114U1930 -1085,-385 r135 bottom
Q366 "B19H1LS--H9C000114U1930" B19H1LS--H9C000114U1930 -1015,-385 r135 bottom
Q367 "B19H1LS--H9C000114U1930" B19H1LS--H9C000114U1930 -945,-385 r135 bottom
Q368 "B19H1LS--H9C000114U1930" B19H1LS--H9C000114U1930 -875,-385 r135 bottom
Q369 "B19H1LS--H9C000114U1930" B19H1LS--H9C000114U1930 -805,-385 r135 bottom
Q370 "B19H1LS--H9C000114U1930" B19H1LS--H9C000114U1930 -735,-385 r135 bottom
Q371 "B19H1LS--H9C000114U1930" B19H1LS--H9C000114U1930 -665,-385 r135 bottom
Q372 "B19H1LS--H9C000114U1930" B19H1LS--H9C000114U1930 -595,-385 r135 bottom
Q373 "B19H1LS--H9C000114U1930" B19H1LS--H9C000114U1930 -525,-385 r135 bottom
Q374 "B19H1LS--H9C000114U1930" B19H1LS--H9C000114U1930 -455,-385 r135 bottom
Q375 "B19H1LS--H9C000114U1930" B19H1LS--H9C000114U1930 -385,-385 r135 bottom
Q376 "B19H1LS--H9C000114U1930" B19H1LS--H9C000114U1930 -315,-385 r135 bottom
Q377 "B19H1LS--H9C000114U1930" B19H1LS--H9C000114U1930 -245,-385 r135 bottom
Q378 "B19H1LS--H9C000114U1930" B19H1LS--H9C000114U1930 -175,-385 r135 bottom
Q379 "B19H1LS--H9C000114U1930" B19H1LS--H9C000114U1930 -105,-385 r135 bottom
Q380 "B19H1LS--H9C000114U1930" B19H1LS--H9C000114U1930 -35,-385 r135 bottom
Q381 "B19H1LS--H9C000114U1930" B19H1LS--H9C000114U1930 35,-385 r135 bottom
Q382 "B19H1LS--H9C000114U1930" B19H1LS--H9C000114U1930 105,-385 r135 bottom
Q383 "B19H1LS--H9C000114U1930" B19H1LS--H9C000114U1930 175,-385 r135 bottom
Q384 "B19H1LS--H9C000114U1930" B19H1LS--H9C000114U1930 245,-385 r135 bottom
Q385 "B19H1LS--H9C000114U1930" B19H1LS--H9C000114U1930 315,-385 r135 bottom
Q386 "B19H1LS--H9C000114U1930" B19H1LS--H9C000114U1930 385,-385 r135 bottom
Q387 "B19H1LS--H9C000114U1930" B19H1LS--H9C000114U1930 455,-385 r135 bottom
Q388 "B19H1LS--H9C000114U1930" B19H1LS--H9C000114U1930 525,-385 r135 bottom
Q389 "B19H1LS--H9C000114U1930" B19H1LS--H9C000114U1930 595,-385 r135 bottom
Q390 "B19H1LS--H9C000114U1930" B19H1LS--H9C000114U1930 665,-385 r135 bottom
Q391 "B19H1LS--H9C000114U1930" B19H1LS--H9C000114U1930 735,-385 r135 bottom
Q392 "B19H1LS--H9C000114U1930" B19H1LS--H9C000114U1930 805,-385 r135 bottom
Q393 "B19H1LS--H9C000114U1930" B19H1LS--H9C000114U1930 875,-385 r135 bottom
Q394 "B19H1LS--H9C000114U1930" B19H1LS--H9C000114U1930 945,-385 r135 bottom
Q395 "B19H1LS--H9C000114U1930" B19H1LS--H9C000114U1930 1015,-385 r135 bottom
Q396 "B19H1LS--H9C000114U1930" B19H1LS--H9C000114U1930 1085,-385 r135 bottom
Q397 "B19H1LS--H9C000114U1930" B19H1LS--H9C000114U1930 1155,-385 r135 bottom
Q398 "B19H1LS--H9C000114U1930" B19H1LS--H9C000114U1930 1225,-385 r135 bottom
Q399 "B19H1LS--H9C000114U1930" B19H1LS--H9C000114U1930 1295,-385 r135 bottom
Q400 "B19H1LS--H9C000114U1930" B19H1LS--H9C000114U1930 1365,-385 r135 bottom
Q401 "B19H1LS--H9C000114U1930" B19H1LS--H9C000114U1930 -1365,-315 r135 bottom
Q402 "B19H1LS--H9C000114U1930" B19H1LS--H9C000114U1930 -1295,-315 r135 bottom
Q403 "B19H1LS--H9C000114U1930" B19H1LS--H9C000114U1930 -1225,-315 r135 bottom
Q404 "B19H1LS--H9C000114U1930" B19H1LS--H9C000114U1930 -1155,-315 r135 bottom
Q405 "B19H1LS--H9C000114U1930" B19H1LS--H9C000114U1930 -1085,-315 r135 bottom
Q406 "B19H1LS--H9C000114U1930" B19H1LS--H9C000114U1930 -1015,-315 r135 bottom
Q407 "B19H1LS--H9C000114U1930" B19H1LS--H9C000114U1930 -945,-315 r135 bottom
Q408 "B19H1LS--H9C000114U1930" B19H1LS--H9C000114U1930 -875,-315 r135 bottom
Q409 "B19H1LS--H9C000114U1930" B19H1LS--H9C000114U1930 -805,-315 r135 bottom
Q410 "B19H1LS--H9C000114U1930" B19H1LS--H9C000114U1930 -735,-315 r135 bottom
Q411 "B19H1LS--H9C000114U1930" B19H1LS--H9C000114U1930 -665,-315 r135 bottom
Q412 "B19H1LS--H9C000114U1930" B19H1LS--H9C000114U1930 -595,-315 r135 bottom
Q413 "B19H1LS--H9C000114U1930" B19H1LS--H9C000114U1930 -525,-315 r135 bottom
Q414 "B19H1LS--H9C000114U1930" B19H1LS--H9C000114U1930 -455,-315 r135 bottom
Q415 "B19H1LS--H9C000114U1930" B19H1LS--H9C000114U1930 -385,-315 r135 bottom
Q416 "B19H1LS--H9C000114U1930" B19H1LS--H9C000114U1930 -315,-315 r135 bottom
Q417 "B19H1LS--H9C000114U1930" B19H1LS--H9C000114U1930 -245,-315 r135 bottom
Q418 "B19H1LS--H9C000114U1930" B19H1LS--H9C000114U1930 -175,-315 r135 bottom
Q419 "B19H1LS--H9C000114U1930" B19H1LS--H9C000114U1930 -105,-315 r135 bottom
Q420 "B19H1LS--H9C000114U1930" B19H1LS--H9C000114U1930 -35,-315 r135 bottom
Q421 "B19H1LS--H9C000114U1930" B19H1LS--H9C000114U1930 35,-315 r135 bottom
Q422 "B19H1LS--H9C000114U1930" B19H1LS--H9C000114U1930 105,-315 r135 bottom
Q423 "B19H1LS--H9C000114U1930" B19H1LS--H9C000114U1930 175,-315 r135 bottom
Q424 "B19H1LS--H9C000114U1930" B19H1LS--H9C000114U1930 245,-315 r135 bottom
Q425 "B19H1LS--H9C000114U1930" B19H1LS--H9C000114U1930 315,-315 r135 bottom
Q426 "B19H1LS--H9C000114U1930" B19H1LS--H9C000114U1930 385,-315 r135 bottom
Q427 "B19H1LS--H9C000114U1930" B19H1LS--H9C000114U1930 455,-315 r135 bottom
Q428 "B19H1LS--H9C000114U1930" B19H1LS--H9C000114U1930 525,-315 r135 bottom
Q429 "B19H1LS--H9C000114U1930" B19H1LS--H9C000114U1930 595,-315 r135 bottom
Q430 "B19H1LS--H9C000114U1930" B19H1LS--H9C000114U1930 665,-315 r135 bottom
Q431 "B19H1LS--H9C000114U1930" B19H1LS--H9C000114U1930 735,-315 r135 bottom
Q432 "B19H1LS--H9C000114U1930" B19H1LS--H9C000114U1930 805,-315 r135 bottom
Q433 "B19H1LS--H9C000114U1930" B19H1LS--H9C000114U1930 875,-315 r135 bottom
Q434 "B19H1LS--H9C000114U1930" B19H1LS--H9C000114U1930 945,-315 r135 bottom
Q435 "B19H1LS--H9C000114U1930" B19H1LS--H9C000114U1930 1015,-315 r135 bottom
Q436 "B19H1LS--H9C000114U1930" B19H1LS--H9C000114U1930 1085,-315 r135 bottom
Q437 "B19H1LS--H9C000114U1930" B19H1LS--H9C000114U1930 1155,-315 r135 bottom
Q438 "B19H1LS--H9C000114U1930" B19H1LS--H9C000114U1930 1225,-315 r135 bottom
Q439 "B19H1LS--H9C000114U1930" B19H1LS--H9C000114U1930 1295,-315 r135 bottom
Q440 "B19H1LS--H9C000114U1930" B19H1LS--H9C000114U1930 1365,-315 r135 bottom
Q441 "B19H1LS--H9C000114U1930" B19H1LS--H9C000114U1930 -1365,-245 r135 bottom
Q442 "B19H1LS--H9C000114U1930" B19H1LS--H9C000114U1930 -1295,-245 r135 bottom
Q443 "B19H1LS--H9C000114U1930" B19H1LS--H9C000114U1930 -1225,-245 r135 bottom
Q444 "B19H1LS--H9C000114U1930" B19H1LS--H9C000114U1930 -1155,-245 r135 bottom
Q445 "B19H1LS--H9C000114U1930" B19H1LS--H9C000114U1930 -1085,-245 r135 bottom
Q446 "B19H1LS--H9C000114U1930" B19H1LS--H9C000114U1930 -1015,-245 r135 bottom
Q447 "B19H1LS--H9C000114U1930" B19H1LS--H9C000114U1930 -945,-245 r135 bottom
Q448 "B19H1LS--H9C000114U1930" B19H1LS--H9C000114U1930 -875,-245 r135 bottom
Q449 "B19H1LS--H9C000114U1930" B19H1LS--H9C000114U1930 -805,-245 r135 bottom
Q450 "B19H1LS--H9C000114U1930" B19H1LS--H9C000114U1930 -735,-245 r135 bottom
Q451 "B19H1LS--H9C000114U1930" B19H1LS--H9C000114U1930 -665,-245 r135 bottom
Q452 "B19H1LS--H9C000114U1930" B19H1LS--H9C000114U1930 -595,-245 r135 bottom
Q453 "B19H1LS--H9C000114U1930" B19H1LS--H9C000114U1930 -525,-245 r135 bottom
Q454 "B19H1LS--H9C000114U1930" B19H1LS--H9C000114U1930 -455,-245 r135 bottom
Q455 "B19H1LS--H9C000114U1930" B19H1LS--H9C000114U1930 -385,-245 r135 bottom
Q456 "B19H1LS--H9C000114U1930" B19H1LS--H9C000114U1930 -315,-245 r135 bottom
Q457 "B19H1LS--H9C000114U1930" B19H1LS--H9C000114U1930 -245,-245 r135 bottom
Q458 "B19H1LS--H9C000114U1930" B19H1LS--H9C000114U1930 -175,-245 r135 bottom
Q459 "B19H1LS--H9C000114U1930" B19H1LS--H9C000114U1930 -105,-245 r135 bottom
Q460 "B19H1LS--H9C000114U1930" B19H1LS--H9C000114U1930 -35,-245 r135 bottom
Q461 "B19H1LS--H9C000114U1930" B19H1LS--H9C000114U1930 35,-245 r135 bottom
Q462 "B19H1LS--H9C000114U1930" B19H1LS--H9C000114U1930 105,-245 r135 bottom
Q463 "B19H1LS--H9C000114U1930" B19H1LS--H9C000114U1930 175,-245 r135 bottom
Q464 "B19H1LS--H9C000114U1930" B19H1LS--H9C000114U1930 245,-245 r135 bottom
Q465 "B19H1LS--H9C000114U1930" B19H1LS--H9C000114U1930 315,-245 r135 bottom
Q466 "B19H1LS--H9C000114U1930" B19H1LS--H9C000114U1930 385,-245 r135 bottom
Q467 "B19H1LS--H9C000114U1930" B19H1LS--H9C000114U1930 455,-245 r135 bottom
Q468 "B19H1LS--H9C000114U1930" B19H1LS--H9C000114U1930 525,-245 r135 bottom
Q469 "B19H1LS--H9C000114U1930" B19H1LS--H9C000114U1930 595,-245 r135 bottom
Q470 "B19H1LS--H9C000114U1930" B19H1LS--H9C000114U1930 665,-245 r135 bottom
Q471 "B19H1LS--H9C000114U1930" B19H1LS--H9C000114U1930 735,-245 r135 bottom
Q472 "B19H1LS--H9C000114U1930" B19H1LS--H9C000114U1930 805,-245 r135 bottom
Q473 "B19H1LS--H9C000114U1930" B19H1LS--H9C000114U1930 875,-245 r135 bottom
Q474 "B19H1LS--H9C000114U1930" B19H1LS--H9C000114U1930 945,-245 r135 bottom
Q475 "B19H1LS--H9C000114U1930" B19H1LS--H9C000114U1930 1015,-245 r135 bottom
Q476 "B19H1LS--H9C000114U1930" B19H1LS--H9C000114U1930 1085,-245 r135 bottom
Q477 "B19H1LS--H9C000114U1930" B19H1LS--H9C000114U1930 1155,-245 r135 bottom
Q478 "B19H1LS--H9C000114U1930" B19H1LS--H9C000114U1930 1225,-245 r135 bottom
Q479 "B19H1LS--H9C000114U1930" B19H1LS--H9C000114U1930 1295,-245 r135 bottom
Q480 "B19H1LS--H9C000114U1930" B19H1LS--H9C000114U1930 1365,-245 r135 bottom
Q481 "B19H1LS--H9C000114U1930" B19H1LS--H9C000114U1930 -1365,-175 r135 bottom
Q482 "B19H1LS--H9C000114U1930" B19H1LS--H9C000114U1930 -1295,-175 r135 bottom
Q483 "B19H1LS--H9C000114U1930" B19H1LS--H9C000114U1930 -1225,-175 r135 bottom
Q484 "B19H1LS--H9C000114U1930" B19H1LS--H9C000114U1930 -1155,-175 r135 bottom
Q485 "B19H1LS--H9C000114U1930" B19H1LS--H9C000114U1930 -1085,-175 r135 bottom
Q486 "B19H1LS--H9C000114U1930" B19H1LS--H9C000114U1930 -1015,-175 r135 bottom
Q487 "B19H1LS--H9C000114U1930" B19H1LS--H9C000114U1930 -945,-175 r135 bottom
Q488 "B19H1LS--H9C000114U1930" B19H1LS--H9C000114U1930 -875,-175 r135 bottom
Q489 "B19H1LS--H9C000114U1930" B19H1LS--H9C000114U1930 -805,-175 r135 bottom
Q490 "B19H1LS--H9C000114U1930" B19H1LS--H9C000114U1930 -735,-175 r135 bottom
Q491 "B19H1LS--H9C000114U1930" B19H1LS--H9C000114U1930 -665,-175 r135 bottom
Q492 "B19H1LS--H9C000114U1930" B19H1LS--H9C000114U1930 -595,-175 r135 bottom
Q493 "B19H1LS--H9C000114U1930" B19H1LS--H9C000114U1930 -525,-175 r135 bottom
Q494 "B19H1LS--H9C000114U1930" B19H1LS--H9C000114U1930 -455,-175 r135 bottom
Q495 "B19H1LS--H9C000114U1930" B19H1LS--H9C000114U1930 -385,-175 r135 bottom
Q496 "B19H1LS--H9C000114U1930" B19H1LS--H9C000114U1930 -315,-175 r135 bottom
Q497 "B19H1LS--H9C000114U1930" B19H1LS--H9C000114U1930 -245,-175 r135 bottom
Q498 "B19H1LS--H9C000114U1930" B19H1LS--H9C000114U1930 -175,-175 r135 bottom
Q499 "B19H1LS--H9C000114U1930" B19H1LS--H9C000114U1930 -105,-175 r135 bottom
Q500 "B19H1LS--H9C000114U1930" B19H1LS--H9C000114U1930 -35,-175 r135 bottom
Q501 "B19H1LS--H9C000114U1930" B19H1LS--H9C000114U1930 35,-175 r135 bottom
Q502 "B19H1LS--H9C000114U1930" B19H1LS--H9C000114U1930 105,-175 r135 bottom
Q503 "B19H1LS--H9C000114U1930" B19H1LS--H9C000114U1930 175,-175 r135 bottom
Q504 "B19H1LS--H9C000114U1930" B19H1LS--H9C000114U1930 245,-175 r135 bottom
Q505 "B19H1LS--H9C000114U1930" B19H1LS--H9C000114U1930 315,-175 r135 bottom
Q506 "B19H1LS--H9C000114U1930" B19H1LS--H9C000114U1930 385,-175 r135 bottom
Q507 "B19H1LS--H9C000114U1930" B19H1LS--H9C000114U1930 455,-175 r135 bottom
Q508 "B19H1LS--H9C000114U1930" B19H1LS--H9C000114U1930 525,-175 r135 bottom
Q509 "B19H1LS--H9C000114U1930" B19H1LS--H9C000114U1930 595,-175 r135 bottom
Q510 "B19H1LS--H9C000114U1930" B19H1LS--H9C000114U1930 665,-175 r135 bottom
Q511 "B19H1LS--H9C000114U1930" B19H1LS--H9C000114U1930 735,-175 r135 bottom
Q512 "B19H1LS--H9C000114U1930" B19H1LS--H9C000114U1930 805,-175 r135 bottom
Q513 "B19H1LS--H9C000114U1930" B19H1LS--H9C000114U1930 875,-175 r135 bottom
Q514 "B19H1LS--H9C000114U1930" B19H1LS--H9C000114U1930 945,-175 r135 bottom
Q515 "B19H1LS--H9C000114U1930" B19H1LS--H9C000114U1930 1015,-175 r135 bottom
Q516 "B19H1LS--H9C000114U1930" B19H1LS--H9C000114U1930 1085,-175 r135 bottom
Q517 "B19H1LS--H9C000114U1930" B19H1LS--H9C000114U1930 1155,-175 r135 bottom
Q518 "B19H1LS--H9C000114U1930" B19H1LS--H9C000114U1930 1225,-175 r135 bottom
Q519 "B19H1LS--H9C000114U1930" B19H1LS--H9C000114U1930 1295,-175 r135 bottom
Q520 "B19H1LS--H9C000114U1930" B19H1LS--H9C000114U1930 1365,-175 r135 bottom
Q521 "B19H1LS--H9C000114U1930" B19H1LS--H9C000114U1930 -1365,-105 r135 bottom
Q522 "B19H1LS--H9C000114U1930" B19H1LS--H9C000114U1930 -1295,-105 r135 bottom
Q523 "B19H1LS--H9C000114U1930" B19H1LS--H9C000114U1930 -1225,-105 r135 bottom
Q524 "B19H1LS--H9C000114U1930" B19H1LS--H9C000114U1930 -1155,-105 r135 bottom
Q525 "B19H1LS--H9C000114U1930" B19H1LS--H9C000114U1930 -1085,-105 r135 bottom
Q526 "B19H1LS--H9C000114U1930" B19H1LS--H9C000114U1930 -1015,-105 r135 bottom
Q527 "B19H1LS--H9C000114U1930" B19H1LS--H9C000114U1930 -945,-105 r135 bottom
Q528 "B19H1LS--H9C000114U1930" B19H1LS--H9C000114U1930 -875,-105 r135 bottom
Q529 "B19H1LS--H9C000114U1930" B19H1LS--H9C000114U1930 -805,-105 r135 bottom
Q530 "B19H1LS--H9C000114U1930" B19H1LS--H9C000114U1930 -735,-105 r135 bottom
Q531 "B19H1LS--H9C000114U1930" B19H1LS--H9C000114U1930 -665,-105 r135 bottom
Q532 "B19H1LS--H9C000114U1930" B19H1LS--H9C000114U1930 -595,-105 r135 bottom
Q533 "B19H1LS--H9C000114U1930" B19H1LS--H9C000114U1930 -525,-105 r135 bottom
Q534 "B19H1LS--H9C000114U1930" B19H1LS--H9C000114U1930 -455,-105 r135 bottom
Q535 "B19H1LS--H9C000114U1930" B19H1LS--H9C000114U1930 -385,-105 r135 bottom
Q536 "B19H1LS--H9C000114U1930" B19H1LS--H9C000114U1930 -315,-105 r135 bottom
Q537 "B19H1LS--H9C000114U1930" B19H1LS--H9C000114U1930 -245,-105 r135 bottom
Q538 "B19H1LS--H9C000114U1930" B19H1LS--H9C000114U1930 -175,-105 r135 bottom
Q539 "B19H1LS--H9C000114U1930" B19H1LS--H9C000114U1930 -105,-105 r135 bottom
Q540 "B19H1LS--H9C000114U1930" B19H1LS--H9C000114U1930 -35,-105 r135 bottom
Q541 "B19H1LS--H9C000114U1930" B19H1LS--H9C000114U1930 35,-105 r135 bottom
Q542 "B19H1LS--H9C000114U1930" B19H1LS--H9C000114U1930 105,-105 r135 bottom
Q543 "B19H1LS--H9C000114U1930" B19H1LS--H9C000114U1930 175,-105 r135 bottom
Q544 "B19H1LS--H9C000114U1930" B19H1LS--H9C000114U1930 245,-105 r135 bottom
Q545 "B19H1LS--H9C000114U1930" B19H1LS--H9C000114U1930 315,-105 r135 bottom
Q546 "B19H1LS--H9C000114U1930" B19H1LS--H9C000114U1930 385,-105 r135 bottom
Q547 "B19H1LS--H9C000114U1930" B19H1LS--H9C000114U1930 455,-105 r135 bottom
Q548 "B19H1LS--H9C000114U1930" B19H1LS--H9C000114U1930 525,-105 r135 bottom
Q549 "B19H1LS--H9C000114U1930" B19H1LS--H9C000114U1930 595,-105 r135 bottom
Q550 "B19H1LS--H9C000114U1930" B19H1LS--H9C000114U1930 665,-105 r135 bottom
Q551 "B19H1LS--H9C000114U1930" B19H1LS--H9C000114U1930 735,-105 r135 bottom
Q552 "B19H1LS--H9C000114U1930" B19H1LS--H9C000114U1930 805,-105 r135 bottom
Q553 "B19H1LS--H9C000114U1930" B19H1LS--H9C000114U1930 875,-105 r135 bottom
Q554 "B19H1LS--H9C000114U1930" B19H1LS--H9C000114U1930 945,-105 r135 bottom
Q555 "B19H1LS--H9C000114U1930" B19H1LS--H9C000114U1930 1015,-105 r135 bottom
Q556 "B19H1LS--H9C000114U1930" B19H1LS--H9C000114U1930 1085,-105 r135 bottom
Q557 "B19H1LS--H9C000114U1930" B19H1LS--H9C000114U1930 1155,-105 r135 bottom
Q558 "B19H1LS--H9C000114U1930" B19H1LS--H9C000114U1930 1225,-105 r135 bottom
Q559 "B19H1LS--H9C000114U1930" B19H1LS--H9C000114U1930 1295,-105 r135 bottom
Q560 "B19H1LS--H9C000114U1930" B19H1LS--H9C000114U1930 1365,-105 r135 bottom
Q561 "B19H1LS--H9C000114U1930" B19H1LS--H9C000114U1930 -1365,-35 r135 bottom
Q562 "B19H1LS--H9C000114U1930" B19H1LS--H9C000114U1930 -1295,-35 r135 bottom
Q563 "B19H1LS--H9C000114U1930" B19H1LS--H9C000114U1930 -1225,-35 r135 bottom
Q564 "B19H1LS--H9C000114U1930" B19H1LS--H9C000114U1930 -1155,-35 r135 bottom
Q565 "B19H1LS--H9C000114U1930" B19H1LS--H9C000114U1930 -1085,-35 r135 bottom
Q566 "B19H1LS--H9C000114U1930" B19H1LS--H9C000114U1930 -1015,-35 r135 bottom
Q567 "B19H1LS--H9C000114U1930" B19H1LS--H9C000114U1930 -945,-35 r135 bottom
Q568 "B19H1LS--H9C000114U1930" B19H1LS--H9C000114U1930 -875,-35 r135 bottom
Q569 "B19H1LS--H9C000114U1930" B19H1LS--H9C000114U1930 -805,-35 r135 bottom
Q570 "B19H1LS--H9C000114U1930" B19H1LS--H9C000114U1930 -735,-35 r135 bottom
Q571 "B19H1LS--H9C000114U1930" B19H1LS--H9C000114U1930 -665,-35 r135 bottom
Q572 "B19H1LS--H9C000114U1930" B19H1LS--H9C000114U1930 -595,-35 r135 bottom
Q573 "B19H1LS--H9C000114U1930" B19H1LS--H9C000114U1930 -525,-35 r135 bottom
Q574 "B19H1LS--H9C000114U1930" B19H1LS--H9C000114U1930 -455,-35 r135 bottom
Q575 "B19H1LS--H9C000114U1930" B19H1LS--H9C000114U1930 -385,-35 r135 bottom
Q576 "B19H1LS--H9C000114U1930" B19H1LS--H9C000114U1930 -315,-35 r135 bottom
Q577 "B19H1LS--H9C000114U1930" B19H1LS--H9C000114U1930 -245,-35 r135 bottom
Q578 "B19H1LS--H9C000114U1930" B19H1LS--H9C000114U1930 -175,-35 r135 bottom
Q579 "B19H1LS--H9C000114U1930" B19H1LS--H9C000114U1930 -105,-35 r135 bottom
Q580 "B19H1LS--H9C000114U1930" B19H1LS--H9C000114U1930 -35,-35 r135 bottom
Q581 "B19H1LS--H9C000114U1930" B19H1LS--H9C000114U1930 35,-35 r135 bottom
Q582 "B19H1LS--H9C000114U1930" B19H1LS--H9C000114U1930 105,-35 r135 bottom
Q583 "B19H1LS--H9C000114U1930" B19H1LS--H9C000114U1930 175,-35 r135 bottom
Q584 "B19H1LS--H9C000114U1930" B19H1LS--H9C000114U1930 245,-35 r135 bottom
Q585 "B19H1LS--H9C000114U1930" B19H1LS--H9C000114U1930 315,-35 r135 bottom
Q586 "B19H1LS--H9C000114U1930" B19H1LS--H9C000114U1930 385,-35 r135 bottom
Q587 "B19H1LS--H9C000114U1930" B19H1LS--H9C000114U1930 455,-35 r135 bottom
Q588 "B19H1LS--H9C000114U1930" B19H1LS--H9C000114U1930 525,-35 r135 bottom
Q589 "B19H1LS--H9C000114U1930" B19H1LS--H9C000114U1930 595,-35 r135 bottom
Q590 "B19H1LS--H9C000114U1930" B19H1LS--H9C000114U1930 665,-35 r135 bottom
Q591 "B19H1LS--H9C000114U1930" B19H1LS--H9C000114U1930 735,-35 r135 bottom
Q592 "B19H1LS--H9C000114U1930" B19H1LS--H9C000114U1930 805,-35 r135 bottom
Q593 "B19H1LS--H9C000114U1930" B19H1LS--H9C000114U1930 875,-35 r135 bottom
Q594 "B19H1LS--H9C000114U1930" B19H1LS--H9C000114U1930 945,-35 r135 bottom
Q595 "B19H1LS--H9C000114U1930" B19H1LS--H9C000114U1930 1015,-35 r135 bottom
Q596 "B19H1LS--H9C000114U1930" B19H1LS--H9C000114U1930 1085,-35 r135 bottom
Q597 "B19H1LS--H9C000114U1930" B19H1LS--H9C000114U1930 1155,-35 r135 bottom
Q598 "B19H1LS--H9C000114U1930" B19H1LS--H9C000114U1930 1225,-35 r135 bottom
Q599 "B19H1LS--H9C000114U1930" B19H1LS--H9C000114U1930 1295,-35 r135 bottom
Q600 "B19H1LS--H9C000114U1930" B19H1LS--H9C000114U1930 1365,-35 r135 bottom
Q601 "B19H1LS--H9C000114U1930" B19H1LS--H9C000114U1930 -1365,35 r135 bottom
Q602 "B19H1LS--H9C000114U1930" B19H1LS--H9C000114U1930 -1295,35 r135 bottom
Q603 "B19H1LS--H9C000114U1930" B19H1LS--H9C000114U1930 -1225,35 r135 bottom
Q604 "B19H1LS--H9C000114U1930" B19H1LS--H9C000114U1930 -1155,35 r135 bottom
Q605 "B19H1LS--H9C000114U1930" B19H1LS--H9C000114U1930 -1085,35 r135 bottom
Q606 "B19H1LS--H9C000114U1930" B19H1LS--H9C000114U1930 -1015,35 r135 bottom
Q607 "B19H1LS--H9C000114U1930" B19H1LS--H9C000114U1930 -945,35 r135 bottom
Q608 "B19H1LS--H9C000114U1930" B19H1LS--H9C000114U1930 -875,35 r135 bottom
Q609 "B19H1LS--H9C000114U1930" B19H1LS--H9C000114U1930 -805,35 r135 bottom
Q610 "B19H1LS--H9C000114U1930" B19H1LS--H9C000114U1930 -735,35 r135 bottom
Q611 "B19H1LS--H9C000114U1930" B19H1LS--H9C000114U1930 -665,35 r135 bottom
Q612 "B19H1LS--H9C000114U1930" B19H1LS--H9C000114U1930 -595,35 r135 bottom
Q613 "B19H1LS--H9C000114U1930" B19H1LS--H9C000114U1930 -525,35 r135 bottom
Q614 "B19H1LS--H9C000114U1930" B19H1LS--H9C000114U1930 -455,35 r135 bottom
Q615 "B19H1LS--H9C000114U1930" B19H1LS--H9C000114U1930 -385,35 r135 bottom
Q616 "B19H1LS--H9C000114U1930" B19H1LS--H9C000114U1930 -315,35 r135 bottom
Q617 "B19H1LS--H9C000114U1930" B19H1LS--H9C000114U1930 -245,35 r135 bottom
Q618 "B19H1LS--H9C000114U1930" B19H1LS--H9C000114U1930 -175,35 r135 bottom
Q619 "B19H1LS--H9C000114U1930" B19H1LS--H9C000114U1930 -105,35 r135 bottom
Q620 "B19H1LS--H9C000114U1930" B19H1LS--H9C000114U1930 -35,35 r135 bottom
Q621 "B19H1LS--H9C000114U1930" B19H1LS--H9C000114U1930 35,35 r135 bottom
Q622 "B19H1LS--H9C000114U1930" B19H1LS--H9C000114U1930 105,35 r135 bottom
Q623 "B19H1LS--H9C000114U1930" B19H1LS--H9C000114U1930 175,35 r135 bottom
Q624 "B19H1LS--H9C000114U1930" B19H1LS--H9C000114U1930 245,35 r135 bottom
Q625 "B19H1LS--H9C000114U1930" B19H1LS--H9C000114U1930 315,35 r135 bottom